# Altium PCB HANC_ANALOG.PcbDoc (part 2 of 2)
Units mil, origin at the board's own origin, x right, y up, seen from the top; angles counter-clockwise.
Board outline 6270 x 3835 mil, 2 copper layers (Top Layer, Bottom Layer); 187 components, 142 nets, 552 pads, 153 vias.
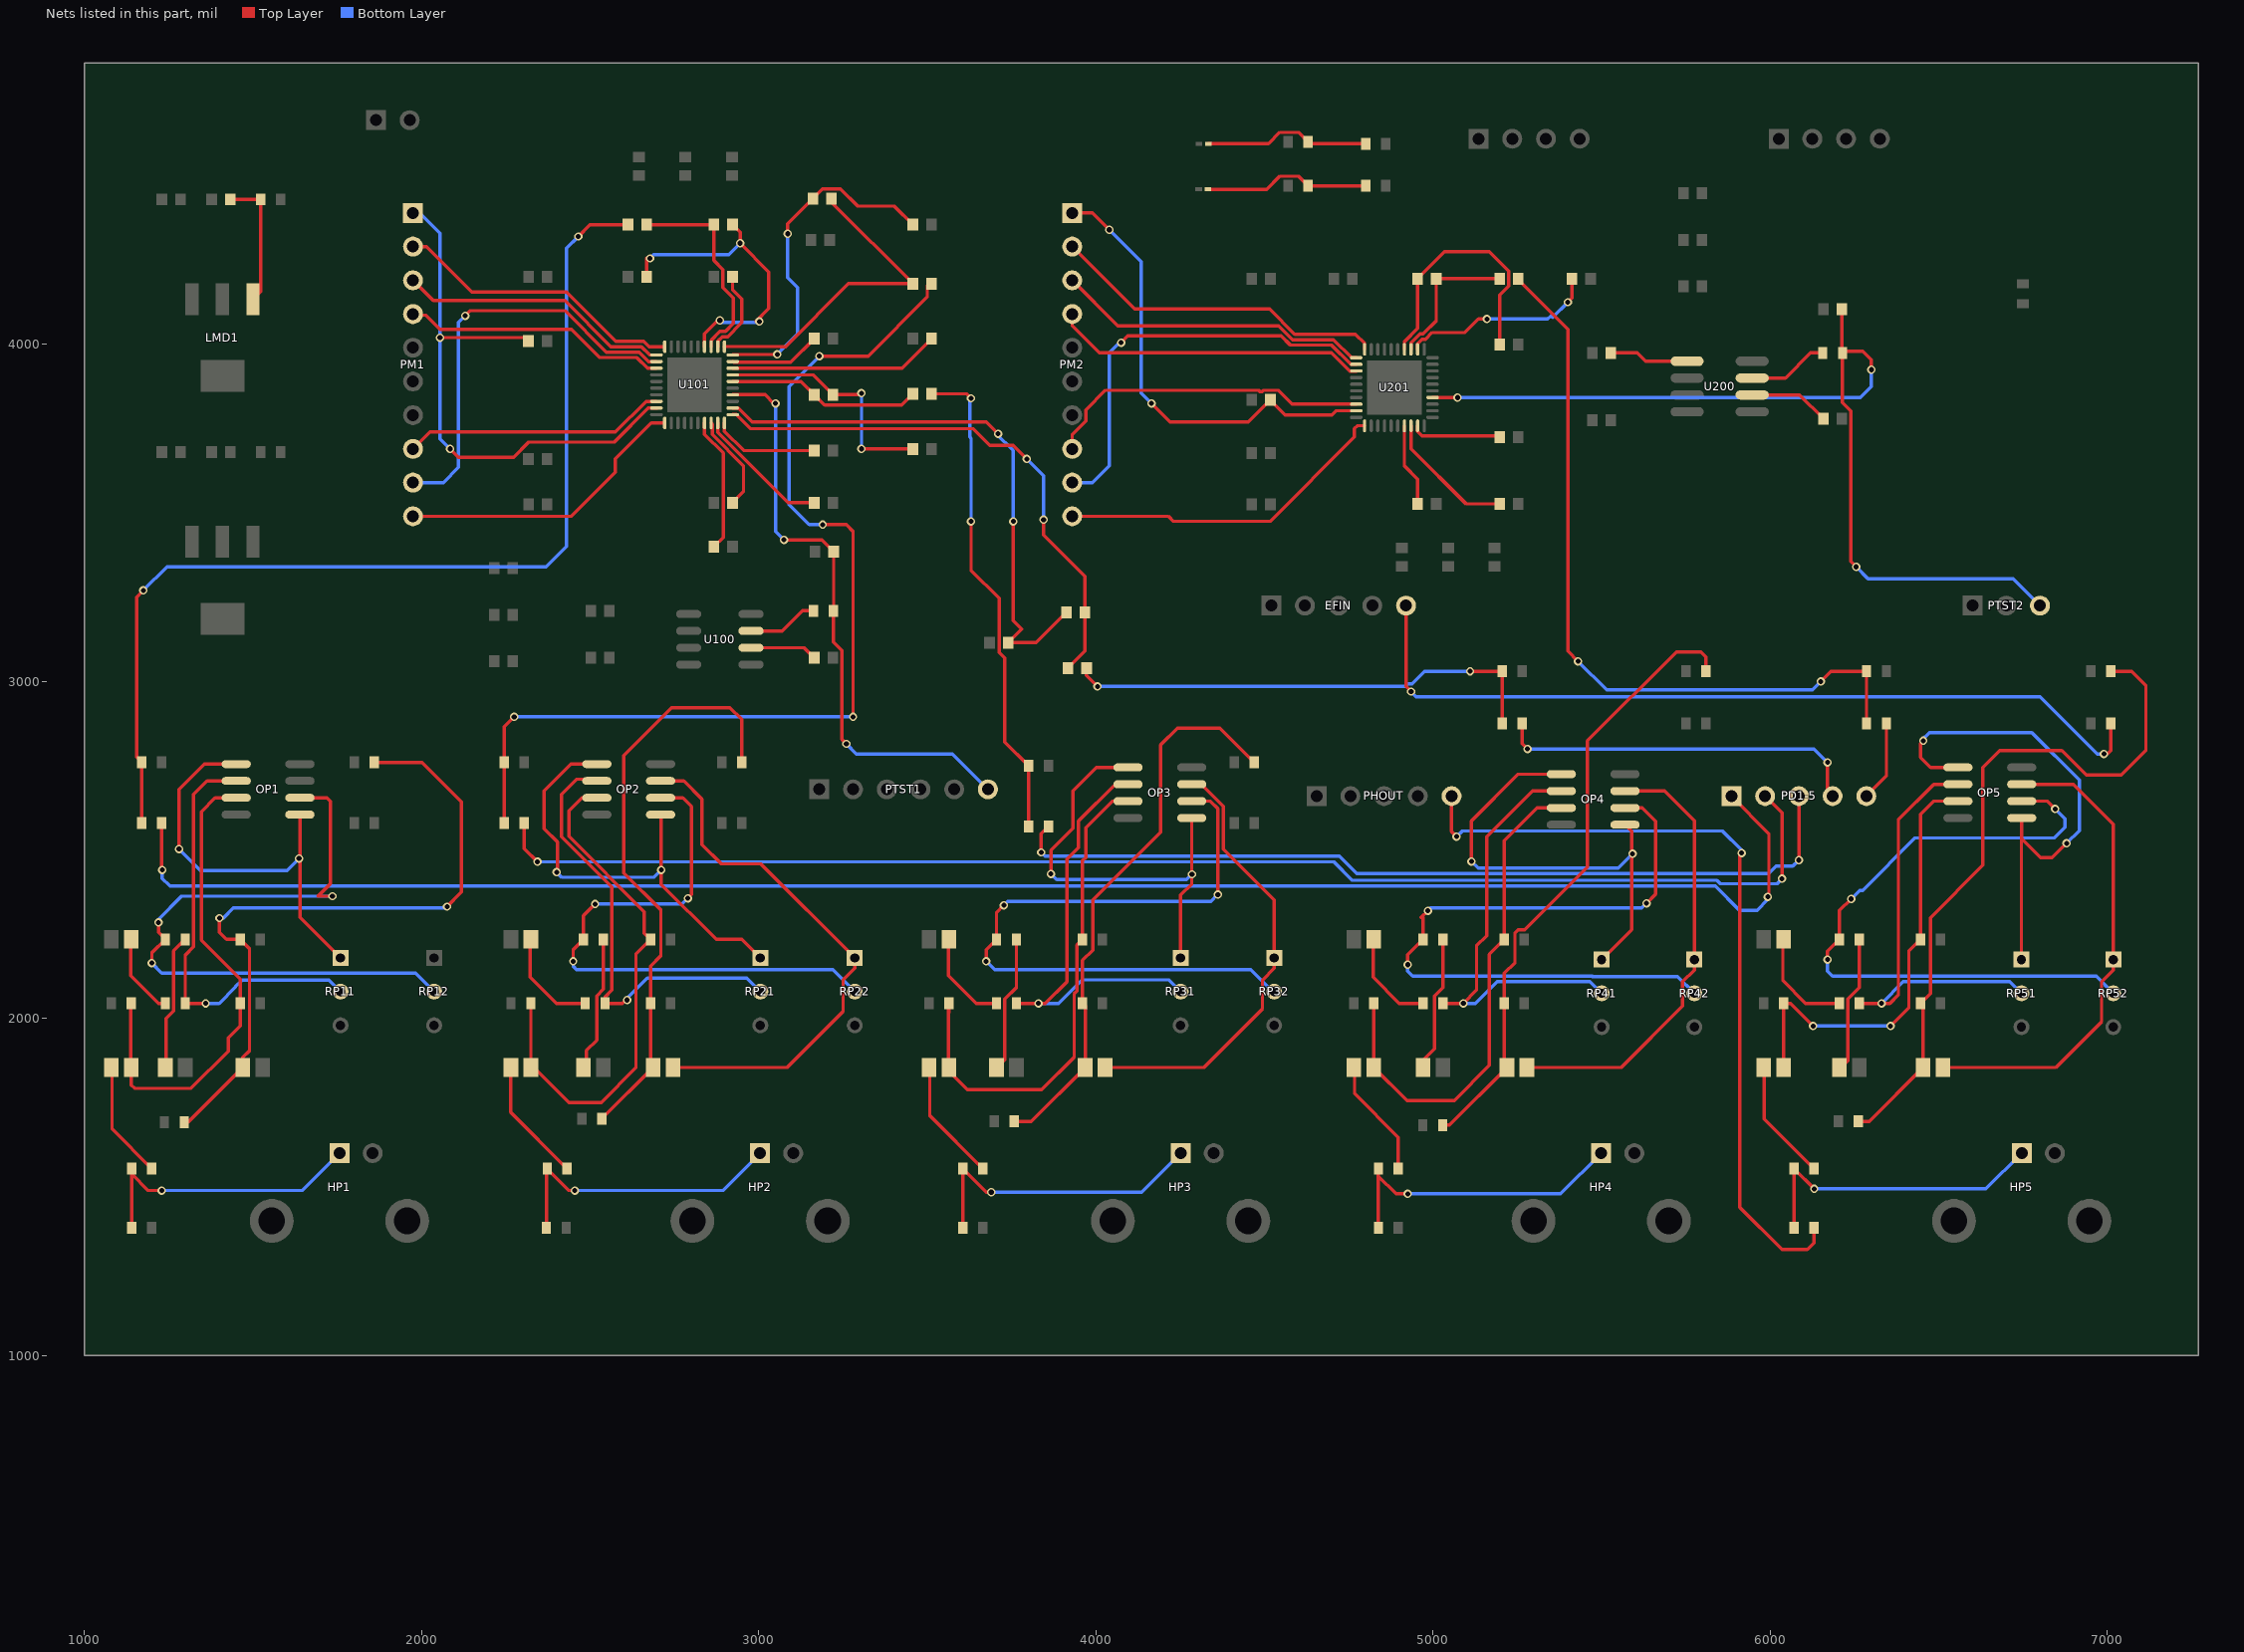
[diagram p2: the nets of this part, all layers, seen from the top]

## Via types
v1: diameter 25, hole 15, Top Layer to Bottom Layer, 153 vias

## Nets (pads, with @x,y where several pads share a name; then routed paths per layer and width w, separated by ;. In a path a pad name is that pad's centre, name@x,y a point inside that pad or via, vN(x,y) a via of type N, cw(c..) or ccw(c..) an arc to the next point about the centre after c; other vN are vias at no path point) (continued)
NetC2_2: C2.2 IF1.2 R2.1 R3.2 | length 2078.5
  Top Layer w10: R3.2@1296.53,1693 1308.35,1693 C2.2@1470.35,1855 1470.35,1885.35 1490,1905 1490,2207.47 R2.1@1462.47,2235 1422,2235 1401,2256 v1(1401,2298) ; IF1.2@1859.53,2760 2002,2760 2119,2643 2119,2375 v1(2076,2332)
  Bottom Layer w10: v1(1401,2298) 1412,2298 1442,2328 2072,2328 v1(2076,2332)
NetC3_1: C3.1 OP2.7 RP22.1 | length 1618.9
  Top Layer w10: OP2.7@2709.13,2705 2778,2705 2832,2651 2832,2516 2889,2459 3006,2459 RP22.1@3285,2180 3285,2149.24 3250.38,2114.62 3250.38,2020.38 3085,1855 C3.1@2746.4,1855
NetC3_2: C3.2 IF2.2 R6.1 R9.2 | length 1752.4
  Top Layer w10: R9.2@2534.53,1703 2535.35,1703 C3.2@2687.35,1855 2679.47,1862.87 R6.1@2679.47,2045 2679.47,2155.47 2710,2186 2710,2322 2600,2432 2600,2780 2742,2922 2915,2922 2949.53,2887.47 IF2.2@2949.53,2760
NetC8_2: C8.2 DVD.2 LMD1.1 | length 395.6
  Top Layer w10: C8.2@1432.68,4430 DVD.2@1523.09,4430 1523.09,4156.71 LMD1.1@1500.55,4134.17
NetC9_1: C9.1 HP1I.1 | length 348.5
  Top Layer w10: C9.1@1082.44,1855 1082.44,1672.09 HP1I.1@1199.53,1555
NetC9_2: C9.2 OP1.3 R1.1 R7.2 | length 1474.3
  Top Layer w10: C9.2@1137.56,1855 1137.56,2043.03 R7.2@1139.53,2045 ; C9.2@1139.53,1855 1139.53,1802.47 1149,1793 1317,1793 1427,1903 1427,1943 1462.47,1978.47 R1.1@1462.47,2045 1462.47,2117.53 1347,2233 1347,2614 1388,2655 OP1.3@1450.51,2655
NetC10_2: C10.2 R4.1 | length 244.6
  Top Layer w10: C10.2@1137.56,2235 1137.56,2127.44 1220,2045 R4.1@1240.47,2045
NetC11_2: C11.2 R5.1 | length 403.6
  Top Layer w10: C11.2@1242.44,1855 1242.44,1999.92 1265.25,2022.73 1265.25,2200.72 R5.1@1299.53,2235
NetC12_1: C12.1 HP2I.1 | length 369.2
  Top Layer w10: C12.1@2265,1855 2265,1722.03 HP2I.1@2432.03,1555
NetC12_2: C12.2 OP2.3 R8.1 R13.2 | length 1566.4
  Top Layer w10: C12.2@2322.56,1855 2324.53,1856.97 R13.2@2324.53,2045 ; C12.2@2328.28,1860.72 2438,1751 2533,1751 2636,1854 2636,2191.53 R8.1@2679.47,2235 2661,2253.47 2661,2317 2437,2541 2437,2616 2476,2655 OP2.3@2520.15,2655
NetC13_2: C13.2 R11.1 | length 307.5
  Top Layer w10: C13.2@2322.56,2235 2322.56,2122.44 2400,2045 R11.1@2485.47,2045
NetC14_2: C14.2 R12.1 | length 403.6
  Top Layer w10: C14.2@2482.44,1855 2489,1861.56 2489,1905.3 2519.75,1936.05 2519.75,2067.27 2539.53,2087.05 R12.1@2539.53,2235
NetC15_1: C15.1 HP3I.1 | length 365.1
  Top Layer w10: C15.1@3507.44,1855 3507.44,1712.09 HP3I.1@3664.53,1555
NetC15_2: C15.2 OP3.3 R14.1 R19.2 | length 1516.4
  Top Layer w10: C15.2@3562.56,1855 3562.56,2043.03 R19.2@3564.53,2045 3564.53,2017.47 ; C15.2@3564.53,1855 3577.53,1842 3577.53,1830.47 3619,1789 3839,1789 3935.82,1885.82 3935.82,2073.72 3944,2081.9 3944,2218.4 R14.1@3960.6,2235 3960.6,2468.6 3970,2478 3970,2566 4049,2645 OP3.3@4095.51,2645
NetC16_2: C16.2 R17.1 | length 284.6
  Top Layer w10: C16.2@3562.56,2235 3562.56,2127.44 3645,2045 R17.1@3705.47,2045
NetC17_2: C17.2 R18.1 | length 403.6
  Top Layer w10: C17.2@3707.44,1855 3730.25,1877.81 3730.25,2057.78 3764.53,2092.05 R18.1@3764.53,2235
NetC18_1: C18.1 HP4I.1 | length 353.7
  Top Layer w10: C18.1@4767.44,1855 4767.44,1777.56 4897.03,1647.97 HP4I.1@4897.03,1555
NetC18_2: C18.2 OP4.3 R20.1 R25.2 | length 1474.8
  Top Layer w10: C18.2@4822.56,1855 4824.53,1856.97 R25.2@4824.53,2045 ; C18.2@4824.53,1855 4922.53,1757 5063,1757 5167,1861 5167,2190.4 R20.1@5211.6,2235 5211.6,2527.6 5309,2625 OP4.3@5344,2625
NetC19_2: C19.2 R23.1 | length 292.5
  Top Layer w10: C19.2@4822.56,2235 4822.56,2122.44 4900,2045 R23.1@4970.47,2045
NetC20_2: C20.2 R24.1 | length 403.6
  Top Layer w10: C20.2@4972.44,1855 4972.44,1877.69 5004.75,1910 5004.75,2067.27 5029.53,2092.05 R24.1@5029.53,2235
NetC21_1: C21.1 HP5I.1 | length 360.9
  Top Layer w10: C21.1@5982.44,1855 5982.44,1702.09 HP5I.1@6129.53,1555
NetC21_2: C21.2 OP5.3 R26.1 R31.2 | length 1328.5
  Top Layer w10: C21.2@6037.56,1855 6039.53,1856.97 R31.2@6039.53,2045 6060,2045 v1(6127,1978) ; v1(6357,1978) 6411,2032 6411,2200.4 R26.1@6445.6,2235 6445.6,2606.6 6484,2645 OP5.3@6556.81,2645
  Bottom Layer w10: v1(6127,1978) v1(6357,1978)
NetC22_2: C22.2 R29.1 | length 318.4
  Top Layer w10: C22.2@6037.56,2235 6037.56,2112.44 6105,2045 R29.1@6205.47,2045
NetC23_2: C23.2 R30.1 | length 409.7
  Top Layer w10: C23.2@6205,1850 6230.25,1875.25 6230.25,2057.78 6264.53,2092.05 R30.1@6264.53,2235
NetC24_1: C24.1 OP3.7 RP32.1 | length 1336.7
  Top Layer w10: C24.1@4027.53,1855 4320,1855 4494.23,2029.23 4494.23,2114.62 4528.85,2149.24 RP32.1@4528.85,2180 4528.85,2352.15 4378,2503 4378,2629.63 4312.63,2695 OP3.7@4284.49,2695
NetC24_2: C24.2 IF3.2 R10.1 R15.2 | length 1673.8
  Top Layer w10: R15.2@3757.53,1695 3808.47,1695 C24.2@3968.47,1855 3968.47,2037.13 R10.1@3960.6,2045 3960.6,2172.6 3991,2203 3991,2352 4192,2553 4192,2812 4242,2862 4367.53,2862 IF3.2@4469.53,2760
NetC25_1: C25.1 OP4.7 RP42.1 | length 1343.3
  Top Layer w10: C25.1@5278.53,1855 5558,1855 5740.38,2037.38 5740.38,2109.62 5775,2144.24 RP42.1@5775,2175 5775,2587 5687,2675 OP4.7@5569.49,2675
NetC25_2: C25.2 IF4.2 R16.1 R21.2 | length 1857.2
  Top Layer w10: R21.2@5028.53,1684 5048.47,1684 C25.2@5219.47,1855 5211.6,1862.87 R16.1@5211.6,2045 5211.6,2134.6 5243,2166 5243,2254.4 5252.32,2263.72 5271.72,2263.72 5458,2450 5458,2824 5722,3088 5794,3088 5809.53,3072.47 IF4.2@5809.53,3030
NetC26_1: C26.1 OP5.7 RP52.1 | length 1447.4
  Top Layer w10: C26.1@6512.53,1855 6847,1855 6982.88,1990.88 6982.88,2109.62 7017.5,2144.24 RP52.1@7017.5,2175 7017.5,2576.5 6899,2695 OP5.7@6745.79,2695
NetC26_2: C26.2 IF5.2 R22.1 R27.2 | length 2106.7
  Top Layer w10: R27.2@6261.53,1695 6293.47,1695 C26.2@6453.47,1855 6453.47,2037.13 R22.1@6445.6,2045 6475,2074.4 6475,2299 6631,2455 6631,2745 6681,2795 6864.62,2795 6937.43,2722.19 7041.19,2722.19 7114,2795 7114,2988 7072,3030 IF5.2@7010,3030
NetC103_1: C103.1 D1.2 S1.2 | length 3110
  Top Layer w10: D1.2@1170.47,2580 S1.2@1170.47,2760 1155,2775.47 1155,3250 v1(1175,3270) ; v1(2465,4320) 2500,4355 C103.1@2612.44,4355
  Bottom Layer w10: v1(1175,3270) 1245,3340 2370,3340 2430,3400 2430,4285 v1(2465,4320)
NetC103_2: C103.2 C104.2 U101.3 | length 622.5
  Top Layer w10: C103.2@2667.56,4355 C104.2@2867.44,4355 2867.44,4249.02 2894.19,4222.27 2894.19,4168.18 2925,4137.37 2925,4061.92 2901.97,4038.89 2885.36,4038.89 2859.21,4012.74 U101.3@2859.21,3993.19
NetC104_1: C104.1 C105.2 U101.4 | length 929.7
  Top Layer w10: C105.2@2667.56,4200 2667.56,4255.56 2668.12,4255 v1(2678,4255) ; U101.4@2839.53,3993.19 2839.53,4031.29 2879.23,4071 v1(2885,4071) ; C104.1@2922.56,4355 2945,4332.56 v1(2945,4300) 3030,4215 3030,4106 2992,4068 v1(3002,4068)
  Bottom Layer w10: v1(2678,4255) 2689,4266 2911,4266 v1(2945,4300) ; v1(2885,4071) 2890.77,4065.23 2999.23,4065.23 v1(3002,4068)
NetC109_1: C109.1 D2.2 S2.2 | length 3026.4
  Top Layer w10: D2.2@2245.47,2580 S2.2@2245.47,2760 2245.47,2865.47 v1(2275,2895) ; v1(3180,3965) 3325,3965 3500,4140 3500,4173.54 3509.51,4183.05 C109.1@3512.56,4180 ; v1(3190,3465) 3260,3465 3280,3445 v1(3280,2895)
  Bottom Layer w10: v1(2275,2895) v1(3280,2895) ; v1(3180,3965) 3090,3875 3090,3525 3150,3465 v1(3190,3465)
NetC109_2: C109.2 C110.2 U101.1 | length 988.8
  Top Layer w10: U101.1@2898.58,3993.19 2898.89,3993.5 3064.73,3993.5 3065.04,3993.19 3079.71,3993.19 3266.52,4180 C109.2@3457.44,4180 3216,4421.44 C110.2@3216,4432.33
NetC110_1: C110.1 C111.2 U101.40 | length 1015.4
  Top Layer w10: U101.40@2923.19,3968.58 2924.61,3970 v1(3055,3970) ; v1(3086,4328) 3086,4357.45 C110.1@3160.88,4432.33 3189.6,4461.05 3242.75,4461.05 3293.8,4410 3402.44,4410 C111.2@3457.44,4355
  Bottom Layer w10: v1(3055,3970) 3115.5,4030.5 3115.5,4168.73 3086,4198.23 v1(3086,4328)
NetC112_1: C112.1 U100.6 | length 199.8
  Top Layer w10: U100.6@2977.52,3100 3134.88,3100 C112.1@3164.88,3070
NetC117_1: C117.1 D3.2 S3.2 | length 1466.5
  Top Layer w10: C117.1@3512.56,3853.33 3616.67,3853.33 v1(3630,3840) ; v1(3630,3475) 3630,3330 3713.25,3246.75 3713.25,3086.28 3730,3069.53 3730,2820.47 S3.2@3800.47,2750 ; D3.2@3800.47,2565 D3.2@3800.47,2570 S3.2@3800.47,2745
  Bottom Layer w10: v1(3630,3475) 3630,3721.77 3626.5,3725.27 3626.5,3836.5 v1(3630,3840)
NetC117_2: C117.2 C118.2 U101.36 | length 577
  Top Layer w10: U101.36@2923.19,3889.84 3125.87,3889.84 C118.2@3164.88,3850.83 3195.72,3820 3424.11,3820 C117.2@3457.44,3853.33
NetC118_1: C118.1 C119.2 U101.37 | length 725.3
  Top Layer w10: U101.37@2923.19,3909.53 3161.31,3909.53 C118.1@3220,3850.83 3300.83,3850.83 v1(3305,3855) ; v1(3305,3690) C119.2@3457.44,3690
  Bottom Layer w10: v1(3305,3690) v1(3305,3855)
NetC126_1: C126.1 D4.2 S4.2 | length 1442.5
  Top Layer w10: C126.1@3972.56,3040 3972.56,3017.44 v1(4005,2985) ; v1(5110,3030) S4.2@5205.47,3030 D4.2@5205.47,2875
  Bottom Layer w10: v1(4005,2985) 4916.77,2985 4925.27,2993.5 4938.5,2993.5 4975,3030 v1(5110,3030)
NetC126_2: C126.2 C127.2 U101.31 | length 1638.5
  Top Layer w10: U101.31@2923.19,3791.42 2933.58,3791.42 2975,3750 3635,3750 3685,3700 3755,3700 v1(3795,3660) ; v1(3845,3480) 3845,3435 3967.56,3312.44 C127.2@3967.56,3205 3967.56,3090.12 C126.2@3917.44,3040
  Bottom Layer w10: v1(3795,3660) 3845,3610 v1(3845,3480)
NetC127_1: C127.1 C129.2 U101.32 | length 1700.7
  Top Layer w10: U101.32@2923.19,3811.1 2939.8,3811.1 2980.9,3770 3675,3770 v1(3710,3735) ; v1(3755,3475) 3755,3180 3780,3155 C129.2@3740,3115 3822.44,3115 C127.1@3912.44,3205
  Bottom Layer w10: v1(3710,3735) 3705,3735 3755,3685 v1(3755,3475)
NetC203_1: C203.1 D5.2 S5.2 | length 2277
  Top Layer w10: C203.1@5252.56,4195 5252.56,4192.44 5400,4045 5400,3090 v1(5430,3060) ; v1(6150,3000) 6180,3030 S5.2@6285.47,3030 D5.2@6285.47,2875
  Bottom Layer w10: v1(5430,3060) 5515,2975 6125,2975 v1(6150,3000)
NetC203_2: C203.2 C204.2 U201.3 | length 434.7
  Top Layer w10: U201.3@4934.71,3985 4934.71,4004.55 4960.86,4030.7 4970.7,4030.7 5009.51,4069.51 C204.2@5009.51,4195 C203.2@5197.44,4195
NetC204_1: C204.1 C205.2 U201.4 | length 781.5
  Top Layer w10: U201.4@4915.02,3985 4915.02,4007.5 4954.39,4046.87 C204.1@4954.39,4195 5034.39,4275 5166.46,4275 5224.19,4217.27 5224.19,4172.73 5197.44,4145.98 C205.2@5197.44,4000
NetC212_1: C212.1 U200.6 | length 240
  Top Layer w10: U200.6@5946.46,3850 6087.44,3850 C212.1@6157.44,3780
NetC214_1: C214.1 U200.1 | length 236.3
  Top Layer w10: C214.1@5527.56,3975 5605,3975 5630,3950 U200.1@5753.54,3950
NetCRFA1_2: CRFA1.2 U101.2 | length 257.4
  Top Layer w10: U101.2@2878.9,3993.19 2878.9,4009.8 2891.99,4022.89 2908.6,4022.89 2947.5,4061.79 2947.5,4062.73 2950,4065.23 2950,4135 2922.56,4162.44 CRFA1.2@2922.56,4200
NetCRFA2_2: CRFA2.2 U201.2 | length 592.6
  Top Layer w10: U201.2@4954.39,3985 4954.39,4001.61 4967.48,4014.7 4977.33,4014.7 4997.63,4035 5095,4035 5135,4075 v1(5160,4075) ; v1(5400,4125) 5412.44,4137.44 CRFA2.2@5412.44,4195
  Bottom Layer w10: v1(5160,4075) 5340,4075 5350,4085 5355,4080 v1(5400,4125)
NetCRFB1_2: CRFB1.2 U101.39 | length 271.7
  Top Layer w10: U101.39@2923.19,3948.9 2925.59,3946.5 3094.72,3946.5 CRFB1.2@3164.88,4016.67
NetCRFC1_2: CRFC1.2 U101.38 | length 625.6
  Top Layer w10: U101.38@2923.19,3929.21 3425.11,3929.21 CRFC1.2@3512.56,4016.67
NetCRFD1_2: CRFD1.2 U101.30 | length 314.8
  Top Layer w10: U101.30@2898.58,3766.81 2898.58,3741.95 2955.53,3685 CRFD1.2@3164.88,3685
NetD1_1: D1.1 PD1-5.1 | length 5335.2
  Top Layer w10: D1.1@1229.53,2580 1229.53,2442.47 v1(1231,2441) ; PD1-5.1@5885,2660 5996,2549 5996,2364 v1(5993,2361)
  Bottom Layer w10: v1(1231,2441) 1231,2418 1230,2417 1254,2393 5605.37,2393 5606.5,2394.13 5607.63,2393 5837,2393 5909,2321 5961,2321 5993,2353 v1(5993,2361)
NetD2_1: D2.1 PD1-5.2 | length 4121.2
  Top Layer w10: D2.1@2304.53,2580 2304.53,2504.53 v1(2344.06,2465) ; PD1-5.2@5985,2660 6035,2610 v1(6035,2415)
  Bottom Layer w10: v1(2344.06,2465) 4706,2465 4760.87,2410.13 5842.5,2410.13 5852.63,2400 6020,2400 v1(6035,2415)
NetD3_1: D3.1 PD1-5.3 | length 2565.6
  Top Layer w10: v1(3838,2493) 3838,2548.47 D3.1@3859.53,2570 ; v1(6085,2470) PD1-5.3@6085,2660
  Bottom Layer w10: v1(3838,2493) 3849.5,2481.5 4722.5,2481.5 4774,2430 5995.77,2430 6017.77,2452 6067,2452 v1(6085,2470)
NetD4_1: D4.1 PD1-5.4 | length 1094.2
  Top Layer w10: D4.1@5264.53,2875 5264.53,2815.47 v1(5280,2800) ; v1(6170,2760) 6170,2675 PD1-5.4@6185,2660
  Bottom Layer w10: v1(5280,2800) 6130,2800 v1(6170,2760)
NetD5_1: D5.1 PD1-5.5 | length 239.7
  Top Layer w10: PD1-5.5@6285,2660 6344.53,2719.53 D5.1@6344.53,2875
NetEAV1_1: EAV1.1 FB2.1 IAV1.1 | length 495.8
  Top Layer w10: FB2.1@4332.56,4460 4506.98,4460 4545.69,4498.72 4600.81,4498.72 IAV1.1@4629.53,4470 EAV1.1@4800.47,4470
NetEDV1_1: EDV1.1 FB1.1 IDV1.1 | length 494.6
  Top Layer w10: FB1.1@4333.78,4595 4511.98,4595 4545.69,4628.72 4600.81,4628.72 IDV1.1@4629.53,4600 4634.53,4595 EDV1.1@4800.47,4595
NetEFIN_5: EFIN.5 XF5.1 | length 2497
  Top Layer w10: EFIN.5@4920,3225 4920,2985 v1(4935,2970) ; v1(6990,2785) 7000,2785 7010,2795 XF5.1@7010,2875
  Bottom Layer w10: v1(4935,2970) 4950,2955 6800,2955 6970,2785 v1(6990,2785)
NetHP1_1: HP1.1 HP1I.2 HP1O.1 | length 857.8
  Top Layer w10: HP1O.1@1140.47,1380 HP1I.2@1140.47,1539.53 ; HP1I.2@1140.47,1555 HP1I.2@1140.47,1539.53 ; v1(1230,1490) 1190,1490 HP1I.2@1140.47,1539.53
  Bottom Layer w10: v1(1230,1490) 1646.12,1490 HP1.1@1756.91,1600.79
NetHP2_1: HP2.1 HP2I.2 HP2O.1 | length 880
  Top Layer w10: HP2O.1@2370.47,1380 2370.47,1552.5 HP2I.2@2372.97,1555 2437.97,1490 v1(2455,1490)
  Bottom Layer w10: v1(2455,1490) 2893.34,1490 HP2.1@3004.13,1600.79
NetHP3_1: HP3.1 HP3I.2 HP3O.1 | length 897.8
  Top Layer w10: HP3O.1@3605.47,1380 HP3I.2@3605.47,1555 3675.47,1485 v1(3690,1485)
  Bottom Layer w10: v1(3690,1485) 4135.56,1485 HP3.1@4251.35,1600.79
NetHP4_1: HP4.1 HP4I.2 HP4O.1 | length 907.2
  Top Layer w10: HP4O.1@4837.97,1380 4837.97,1532.03 ; HP4I.2@4837.97,1555 4837.97,1532.03 ; v1(4925,1480) 4890,1480 4837.97,1532.03
  Bottom Layer w10: v1(4925,1480) 5377.78,1480 HP4.1@5498.57,1600.79
NetHP5_1: HP5.1 HP5I.2 HP5O.1 | length 919
  Top Layer w10: HP5O.1@6070.47,1380 HP5I.2@6070.47,1555 v1(6130.47,1495)
  Bottom Layer w10: v1(6130.47,1495) 6640,1495 HP5.1@6745.79,1600.79
NetHP5O_2: HP5O.2 PHOUT.5 | length 2388.4
  Top Layer w10: PHOUT.5@5055,2660 5055,2555 v1(5070,2540) ; v1(5915,2491) 5910,2486 5910,1440 6035,1315 6110,1315 6129.53,1334.53 HP5O.2@6129.53,1380
  Bottom Layer w10: v1(5070,2540) 5086.5,2556.5 5858.5,2556.5 5915,2500 v1(5915,2491)
NetOP1_1: OP1.1 OP1.5 RP11.1 | length 1249.9
  Top Layer w10: v1(1281,2503) 1281,2680 1356,2755 OP1.1@1450.51,2755 ; OP1.5@1639.49,2605 1639.49,2300.51 RP11.1@1760,2180
  Bottom Layer w10: v1(1281,2503) 1345,2439 1601,2439 v1(1637,2475)
NetOP1_2: OP1.2 R4.2 RP11.2 | length 1277.5
  Top Layer w10: v1(1360,2045) R4.2@1299.53,2045 1299.53,2187.95 1324.31,2212.73 1324.31,2665 1364.31,2705 OP1.2@1450.51,2705
  Bottom Layer w10: v1(1360,2045) 1400,2045 1447.88,2092.88 1447.88,2094.34 1468.16,2114.62 1725.38,2114.62 RP11.2@1760,2080
NetOP1_6: OP1.6 R5.2 RP12.2 | length 2006.7
  Top Layer w10: v1(1200.47,2164.53) 1200.47,2195 R5.2@1240.47,2235 1220,2255.47 v1(1220,2285) ; OP1.6@1639.49,2655 1720,2655 1730,2645 1730,2400 1693,2363 v1(1736,2363)
  Bottom Layer w10: v1(1200.47,2164.53) 1230,2135 1982.5,2135 RP12.2@2037.5,2080 ; v1(1220,2285) 1220,2295 1288,2363 v1(1736,2363)
NetOP2_1: OP2.1 OP2.5 RP21.1 | length 1368.6
  Top Layer w10: v1(2401,2434) 2403,2436 2403,2524 2364,2563 2364,2676 2443,2755 OP2.1@2520.15,2755 ; OP2.5@2709.13,2605 2715,2599.13 2711,2595.13 v1(2711,2441) 2711,2398 2874,2235 2950,2235 RP21.1@3005,2180
  Bottom Layer w10: v1(2401,2434) 2416,2419 2689,2419 v1(2711,2441)
NetOP2_2: OP2.2 R11.2 RP21.2 | length 1341
  Top Layer w10: OP2.2@2520.15,2705 2515.15,2710 2460,2710 2415,2665 2415,2540 2565,2390 2565,2085 2544.53,2064.53 R11.2@2544.53,2045 2595.47,2045 2610,2059.53 v1(2610,2055)
  Bottom Layer w10: v1(2610,2055) 2605,2055 2670,2120 2965,2120 RP21.2@3005,2080
NetOP2_6: OP2.6 R12.2 RP22.2 | length 1739.2
  Top Layer w10: v1(2450,2170) 2450,2204.53 R12.2@2480.47,2235 2480.47,2305.47 v1(2515,2340) ; OP2.6@2709.13,2655 2775,2655 2801,2629 2801,2368 v1(2790,2357)
  Bottom Layer w10: v1(2450,2170) 2450,2155 2460,2145 3220,2145 RP22.2@3285,2080 ; v1(2515,2340) 2773,2340 v1(2790,2357)
NetOP3_1: OP3.1 OP3.5 RP31.1 | length 1326.4
  Top Layer w10: v1(3867,2429) 3867,2499 3932,2564 3932,2676 4001,2745 OP3.1@4095.51,2745 ; RP31.1@4251.35,2180 4251.35,2366.35 4284.49,2399.49 OP3.5@4284.49,2595
  Bottom Layer w10: v1(3867,2429) 3884,2412 4269,2412 v1(4285,2428)
NetOP3_2: OP3.2 R17.2 RP31.2 | length 1324.6
  Top Layer w10: R17.2@3764.53,2045 v1(3830,2045) 3850,2045 3914,2109 3914,2473 3948,2507 3948,2586 4057,2695 OP3.2@4095.51,2695
  Bottom Layer w10: v1(3830,2045) 3889.88,2045 3959.89,2115 4216.35,2115 RP31.2@4251.35,2080
NetOP3_6: OP3.6 R18.2 RP32.2 | length 2069.7
  Top Layer w10: v1(3675,2170) 3675,2204.53 R18.2@3705.47,2235 3705.47,2315.47 3726,2336 v1(3727,2336) ; OP3.6@4284.49,2645 4340,2645 4362,2623 v1(4362,2368)
  Bottom Layer w10: v1(3675,2170) 3699.62,2145.38 4459.62,2145.38 4525,2080 RP32.2@4528.85,2080 ; v1(3727,2336) 3727,2337 3738,2348 4341,2348 4361,2368 v1(4362,2368)
NetOP4_1: OP4.1 OP4.5 RP41.1 | length 1393.1
  Top Layer w10: v1(5114,2466) 5114,2586 5253,2725 OP4.1@5380.51,2725 ; RP41.1@5500,2175 5589,2264 5589,2555.49 OP4.5@5569.49,2575
  Bottom Layer w10: v1(5114,2466) 5134,2446 5549,2446 v1(5592,2489)
NetOP4_2: OP4.2 R23.2 RP41.2 | length 1312
  Top Layer w10: R23.2@5029.53,2045 v1(5090,2045) 5129,2084 5129,2216 5159,2246 5159,2539 5295,2675 OP4.2@5380.51,2675
  Bottom Layer w10: v1(5090,2045) 5125.76,2045 5190.38,2109.62 5465.38,2109.62 RP41.2@5500,2075
NetOP4_6: OP4.6 R24.2 RP42.2 | length 2107.5
  Top Layer w10: v1(4925,2160) 4925,2189.53 R24.2@4970.47,2235 4970.47,2300 4965,2300 v1(4985,2320) ; OP4.6@5569.49,2625 5620,2625 5660,2585 5660,2369 v1(5633,2342)
  Bottom Layer w10: v1(4925,2160) 4925,2140.62 4940,2125.62 5472.01,2125.62 5472.63,2125 5725,2125 RP42.2@5775,2075 ; v1(4985,2320) 4993,2328 5619,2328 v1(5633,2342)
NetOP5_1: OP5.1 OP5.5 RP51.1 | length 1571.8
  Top Layer w10: v1(6454,2824) 6446,2816 6446,2775 6476,2745 OP5.1@6556.81,2745 ; RP51.1@6745,2175 6745,2594.21 OP5.5@6745.79,2595 6745.79,2533 6801.79,2477 6836,2477 v1(6879,2520)
  Bottom Layer w10: v1(6454,2824) 6451,2827 6472,2848 6776,2848 6916.5,2707.5 6916.5,2557.5 v1(6879,2520)
NetOP5_2: OP5.2 R29.2 RP51.2 | length 1322.2
  Top Layer w10: R29.2@6264.53,2045 v1(6330,2045) 6355,2045 6380,2070 6380,2590 6485,2695 OP5.2@6556.81,2695
  Bottom Layer w10: v1(6330,2045) 6394.62,2109.62 6710.38,2109.62 RP51.2@6745,2075
NetOP5_6: OP5.6 R30.2 RP52.2 | length 2015.6
  Top Layer w10: v1(6170,2175) 6170,2199.53 R30.2@6205.47,2235 6205.47,2320.47 v1(6240,2355) ; OP5.6@6745.79,2645 6822,2645 v1(6845,2622)
  Bottom Layer w10: v1(6170,2175) 6170,2140.62 6185,2125.62 6966.88,2125.62 RP52.2@7017.5,2075 ; v1(6240,2355) 6265,2380 6274,2380 6430,2536 6843,2536 6874,2567 6874,2593 v1(6845,2622)
NetRBP1_2: RBP1.2 U100.7 | length 210.2
  Top Layer w10: U100.7@2977.52,3150 3070,3150 3130,3210 RBP1.2@3162.91,3210
NetRBP2_2: RBP2.2 U200.7 | length 240.1
  Top Layer w10: U200.7@5946.46,3900 6045,3900 6120,3975 RBP2.2@6155.47,3975
PA8_MCO1: C130.1 PM1.1 U101.19 | length 1709.3
  Top Layer w10: v1(2055,4020) 2307.32,4020 C130.1@2317.32,4010 ; v1(2085,3690) 2110,3665 2273.3,3665 2318.3,3710 2571.77,3710 2672.79,3811.02 U101.19@2699.67,3811.02
  Bottom Layer w10: PM1.1@1975,4390 1995,4390 2055,4330 v1(2055,4020) 2055,3720 v1(2085,3690)
PB0_SHDN1: PM1.10 U101.21 | length 884.5
  Top Layer w10: PM1.10@1975,3490 2445,3490 2575,3620 2575,3660 2681.81,3766.81 U101.21@2721.42,3766.81
PB1_UP-DWN1: PM1.2 U101.10 | length 869.4
  Top Layer w10: PM1.2@1975,4290 2015,4290 2150,4155 2430,4155 2576,4009 2658.97,4009 2674.78,3993.19 U101.10@2721.42,3993.19
PB2_DACSTEP1: PM1.3 U101.11 | length 813.5
  Top Layer w10: PM1.3@1975,4190 2035,4130 2425,4130 2562,3993 2652.34,3993 2676.76,3968.58 U101.11@2696.81,3968.58
PB10_CONVRUN1: PM1.9 U101.12 | length 1247.5
  Top Layer w10: v1(2130,4085) 2145,4100 2425,4100 2548,3977 2645.72,3977 2673.82,3948.9 U101.12@2696.81,3948.9
  Bottom Layer w10: PM1.9@1975,3590 2065,3590 2110,3635 2110,4065 v1(2130,4085)
PB12_EOC2: PM2.8 U201.18 | length 978.3
  Top Layer w10: PM2.8@3930,3690 3930,3732.69 3970.53,3773.21 3970.53,3805.53 4028.72,3863.72 4482.74,3863.72 4486.46,3860 4493.54,3860 4497.25,3863.72 4541.28,3863.72 4582.4,3822.6 U201.18@4772.31,3822.6
PB13_EOC1: PM1.8 U101.18 | length 780.1
  Top Layer w10: PM1.8@1975,3690 2025,3740 2575,3740 2665.79,3830.79 U101.18@2696.81,3830.79
PC9_MCO2: C230.1 PM2.1 U201.19 | length 1377.7
  Top Layer w10: PM2.1@3930,4390 3990,4390 v1(4040,4340) ; v1(4165,3825) 4220,3770 4452.56,3770 C230.1@4517.56,3835 4561.56,3791 4700.37,3791 4712.28,3802.91 U201.19@4772.31,3802.91
  Bottom Layer w10: v1(4040,4340) 4135,4245 4135,3855 v1(4165,3825)
PD0_CS1: PM1.4 U101.13 | length 788.4
  Top Layer w10: PM1.4@1975,4090 1978.5,4086.5 2013.5,4086.5 2055,4045 2445,4045 2529,3961 2639.09,3961 2670.88,3929.21 U101.13@2696.81,3929.21
PD1_CS2: PM2.4 U201.13 | length 932.8
  Top Layer w10: PM2.4@3930,4090 3930,4055 4010,3975 4698.78,3975 4752.76,3921.02 U201.13@4772.31,3921.02
PD10_SHDN2: PM2.10 U201.21 | length 1005
  Top Layer w10: PM2.10@3930,3490 4215,3490 4230,3475 4516.58,3475 4767,3725.42 4767,3750 4775.62,3758.62 U201.21@4796.91,3758.62
PD11_UP-DWN2: PM2.2 U201.10 | length 1003.8
  Top Layer w10: PM2.2@3930,4290 4115,4105 4515,4105 4590,4030 4770,4030 4796.91,4003.09 U201.10@4796.91,3985
PD12_DACSTEP2: PM2.3 U201.11 | length 937.4
  Top Layer w10: PM2.3@3930,4190 4065,4055 4542.37,4055 4583.37,4014 4705.03,4014 4758.64,3960.39 U201.11@4772.31,3960.39
PE15_CONVRUN2: PM2.9 U201.12 | length 1260.7
  Top Layer w10: v1(4075,4005) 4095,4025 4549.75,4025 4576.75,3998 4698.41,3998 4755.7,3940.71 U201.12@4772.31,3940.71
  Bottom Layer w10: PM2.9@3930,3590 3990,3590 4040,3640 4040,3975 4075,4010 v1(4075,4005)
REFBP1: C125.1 PTST1.6 RBP1.1 U101.34 | length 1776.7
  Top Layer w10: U101.34@2923.19,3850.47 3019.53,3850.47 3045,3825 v1(3050,3825) ; v1(3075,3420) 3187.56,3420 C125.1@3222.56,3385 3222.56,3210.59 RBP1.1@3221.97,3210 3221.97,3117.05 3246.75,3092.27 3246.75,2828.25 v1(3260,2815)
  Bottom Layer w10: v1(3050,3825) 3050,3445 v1(3075,3420) ; v1(3260,2815) 3290,2785 3575,2785 PTST1.6@3680,2680
REFBP2: C225.1 PTST2.3 RBP2.1 U201.34 | length 2868
  Top Layer w10: U201.34@4998.69,3842.28 v1(5072.72,3842.28) ; C225.1@6212.56,4105 6212.56,3976.97 RBP2.1@6214.53,3975 ; v1(6255,3340) 6239.31,3355.69 6239.31,3802.27 6214.53,3827.05 RBP2.1@6214.53,3975 ; v1(6300,3925) 6300,3955 6275,3980 6219.53,3980 RBP2.1@6214.53,3975
  Bottom Layer w10: v1(5072.72,3842.28) 6267.28,3842.28 6300,3875 v1(6300,3925) ; v1(6255,3340) 6290,3305 6720,3305 PTST2.3@6800,3225
REFDA2: C223.2 U201.29 | length 266.7
  Top Layer w10: U201.29@4954.39,3758.62 4954.39,3742.01 4967.48,3728.92 5193.52,3728.92 C223.2@5197.44,3725
REFDAC1: C122.2 U101.29 | length 400.4
  Top Layer w10: U101.29@2878.9,3766.81 2878.9,3739 3087.9,3530 C122.2@3164.88,3530
REFDACH1: C121.1 U101.28 | length 289.9
  Top Layer w10: U101.28@2859.21,3766.81 2862.9,3763.13 2862.9,3732.37 2955,3640.27 2955,3562.44 C121.1@2922.56,3530
REFDACH2: C222.1 U201.28 | length 398.7
  Top Layer w10: U201.28@4934.71,3758.62 4934.71,3690.29 5098.09,3526.91 C222.1@5197.44,3526.91
REFDACL1: C120.2 U101.27 | length 401.2
  Top Layer w10: U101.27@2839.53,3766.81 2839.53,3733.12 2895,3677.65 2895,3427.56 C120.2@2867.44,3400
REFDACL2: C221.2 U201.27 | length 248
  Top Layer w10: U201.27@4915.02,3758.62 4915.02,3639.98 4954.39,3600.61 C221.2@4954.39,3526.91
pads on no net: RP11.3 RP12.3 RP21.3 RP22.3 RP31.3 RP32.3 RP41.3 RP42.3 RP51.3 RP52.3 U100.5 U100.8 U101.41 U200.5 U200.8 U201.1 U201.30 U201.31 U201.32 U201.36 U201.37 U201.38 U201.39 U201.40 U201.41

## Polygon pours and split planes (outlines as drawn)
DGND on Top Layer "DGND_L01_P000" (solid, pour order 0): 1785,4835 1785,3395 2438,3395 2770,3727 2770,3905 2784,3941 2793,3962 2793,4246 3674,4246 3865,4246 3865,4055 3865,3400 4535,3400 4844,3709 4844,3914 4863,3933 4863,4145 7230,4145 7270,4145 7270,4185 7270,4835 1790,4835
AGND on Top Layer "AGND_L01_P002" (solid, pour order 2): 995,4840 1005,4830 1005,1005 7275,1005 7270,1010 7270,4100 7270,4145 4867,4145 4867,3937 4845,3915 4849,3911 4847,3706 4535,3390 4530,3395 3860,3395 3860,4045 3860,4235 3831,4235 2796.26,4235 2794,3952 2788,3925 2775,3900 2775,3723 2428.5,3376.5 2415,3390 1775,3390 1775,4835 1010,4835

## Silkscreen, mask and mechanical layers (free items; w line width, h text height)
Top Overlay:
  text "HANC Analog Rev. 1.0" at 2486,4710 h80
  text "XADCpwr" at 5240,4690 h60
  text "OSC" at 1810,4380 h30
  text "OSC" at 4060,4375 h30
  text "DGND" at 6359,4356 h50 r90
  text "D3V3" at 6047,4354 h50 r90
  text "AGND" at 6251,4350 h50 r90
  text "A3V3" at 6154,4349 h50 r90
  text "U/D" at 1800,4280 h30
  text "U/D" at 4050,4275 h30
  text "D-S" at 1800,4180 h30
  text "D-S" at 4050,4175 h30
  text "Out" at 1170,4115 h40
  text "CS" at 1830,4080 h30
  text "CS" at 4080,4075 h30
  text "GND" at 6689,4007 h60
  text "MISO" at 1780,3980 h30
  text "MISO" at 4030,3975 h30
  text "MOSI" at 1780,3890 h30
  text "MOSI" at 4030,3885 h30
  text "SCLK" at 1780,3780 h30
  text "SCLK" at 4030,3775 h30
  text "EOC" at 1810,3680 h30
  text "EOC" at 4060,3675 h30
  text "C-R" at 1800,3570 h30
  text "C-R" at 4050,3565 h30
  text "SHD" at 1800,3470 h30
  text "SHD" at 4050,3465 h30
  text "Out" at 1160,3395 h40
  text "FLT5" at 6621,2969 h50 r90
  text "AOUT2" at 6723,2923 h50 r90
  text "RFBP2" at 6837,2915 h50 r90
  text "FLT1" at 3189,2428 h50 r90
  text "FLT2" at 3307,2428 h50 r90
  text "FLT3" at 3414,2428 h50 r90
  text "FLT4" at 3507,2428 h50 r90
  text "AOUT1" at 3606,2394.68 h50 r90
  text "RFBP1" at 3708,2394.68 h50 r90
Bottom Overlay:
  text "HydroDynamix" at 6196,3664 h80
  text "3/1/17 / Flor Gordivas / Ryan Sigar / SJ Park / Matt McNichols / Ha Tran / Jeong Min Lee" at 6236,2941 h50
Mechanical 1:
  the board outline again, w47.24